# Altium PCB Board.PcbDoc
Units mm, origin at the board's own origin, x right, y up, seen from the top; angles counter-clockwise.
Board outline 73 x 86 mm, 4 copper layers (Top Layer, Gnd top, Gnd bot, Bottom Layer), stack 0.603 mm thick; 52 components, 35 nets, 180 pads, 66 vias.
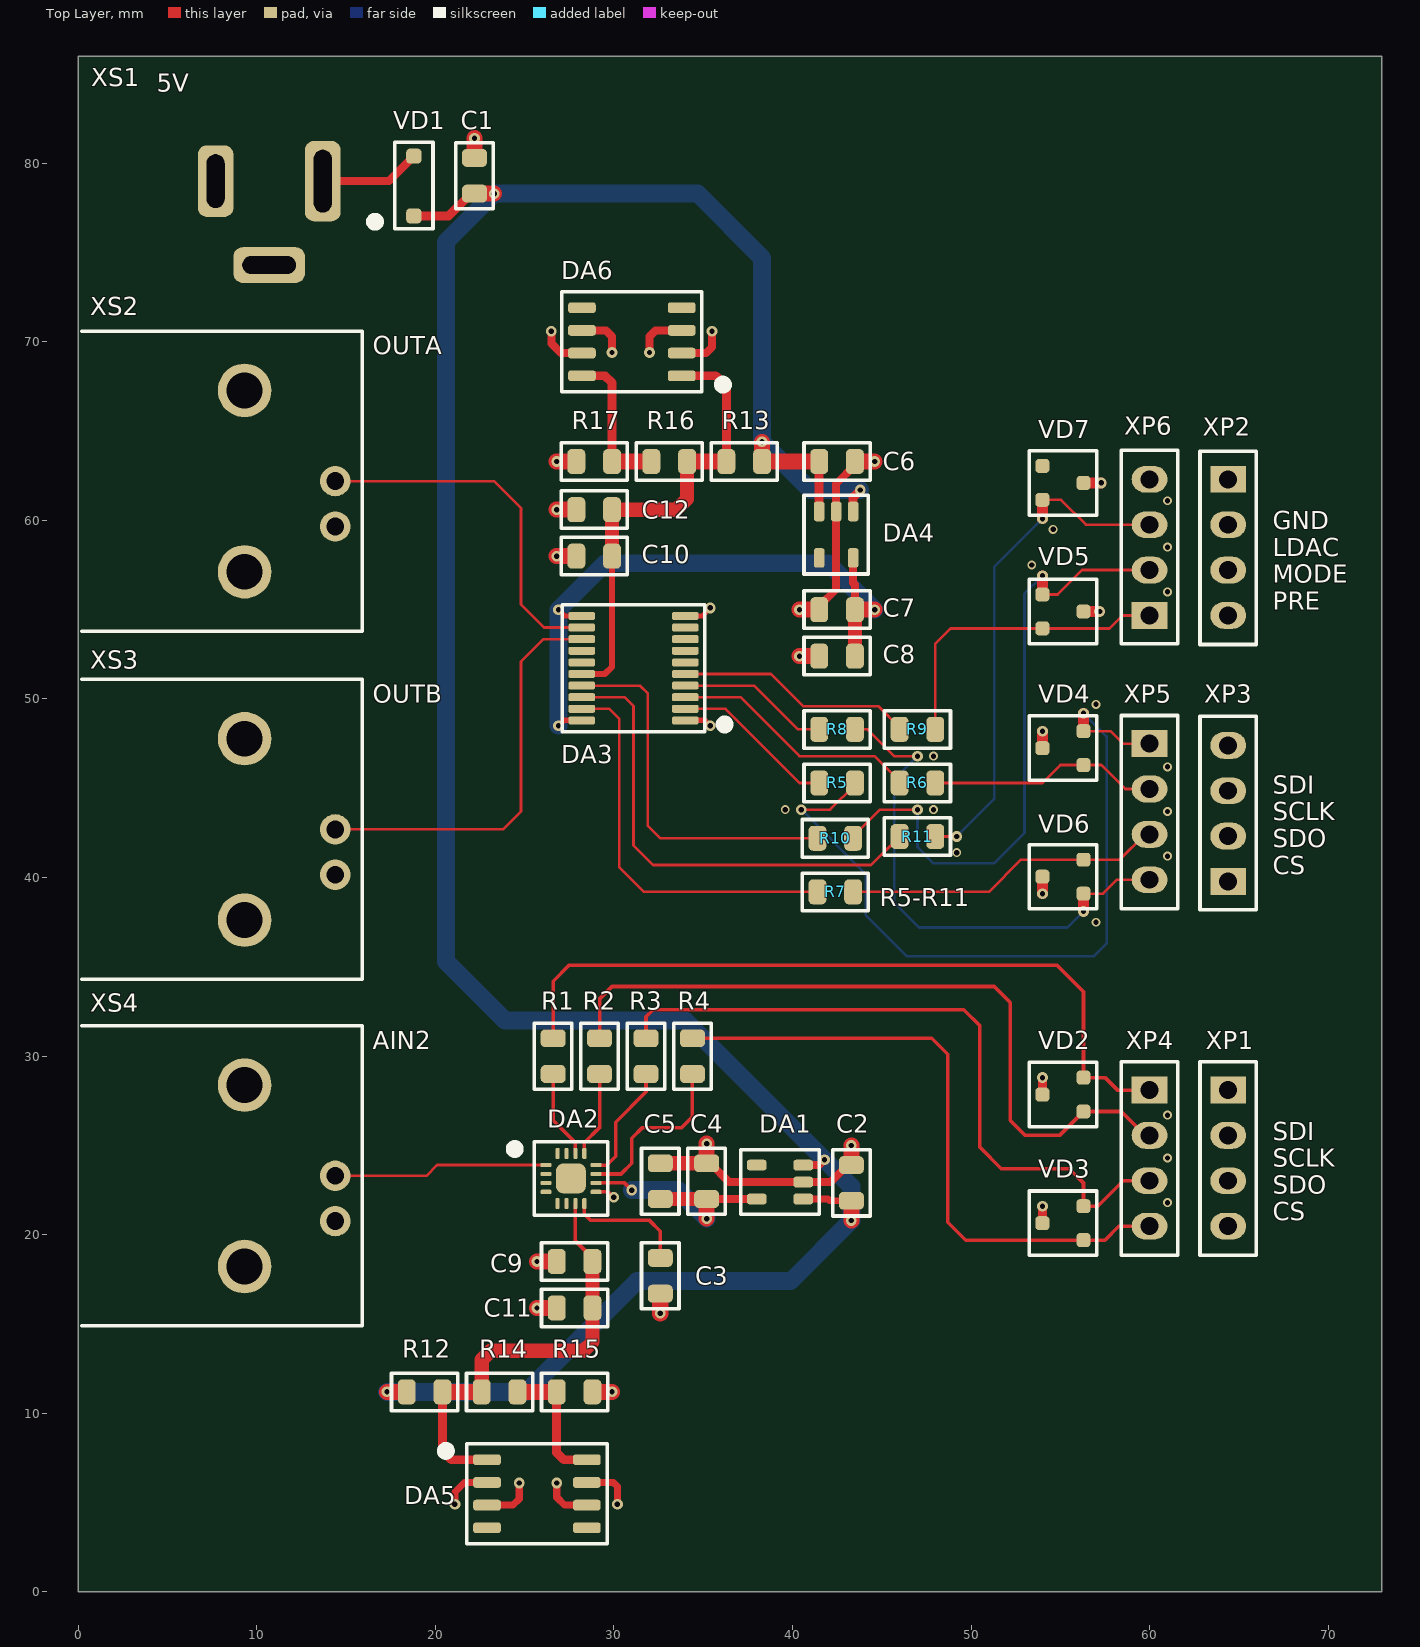
[diagram p0: Top Layer view]
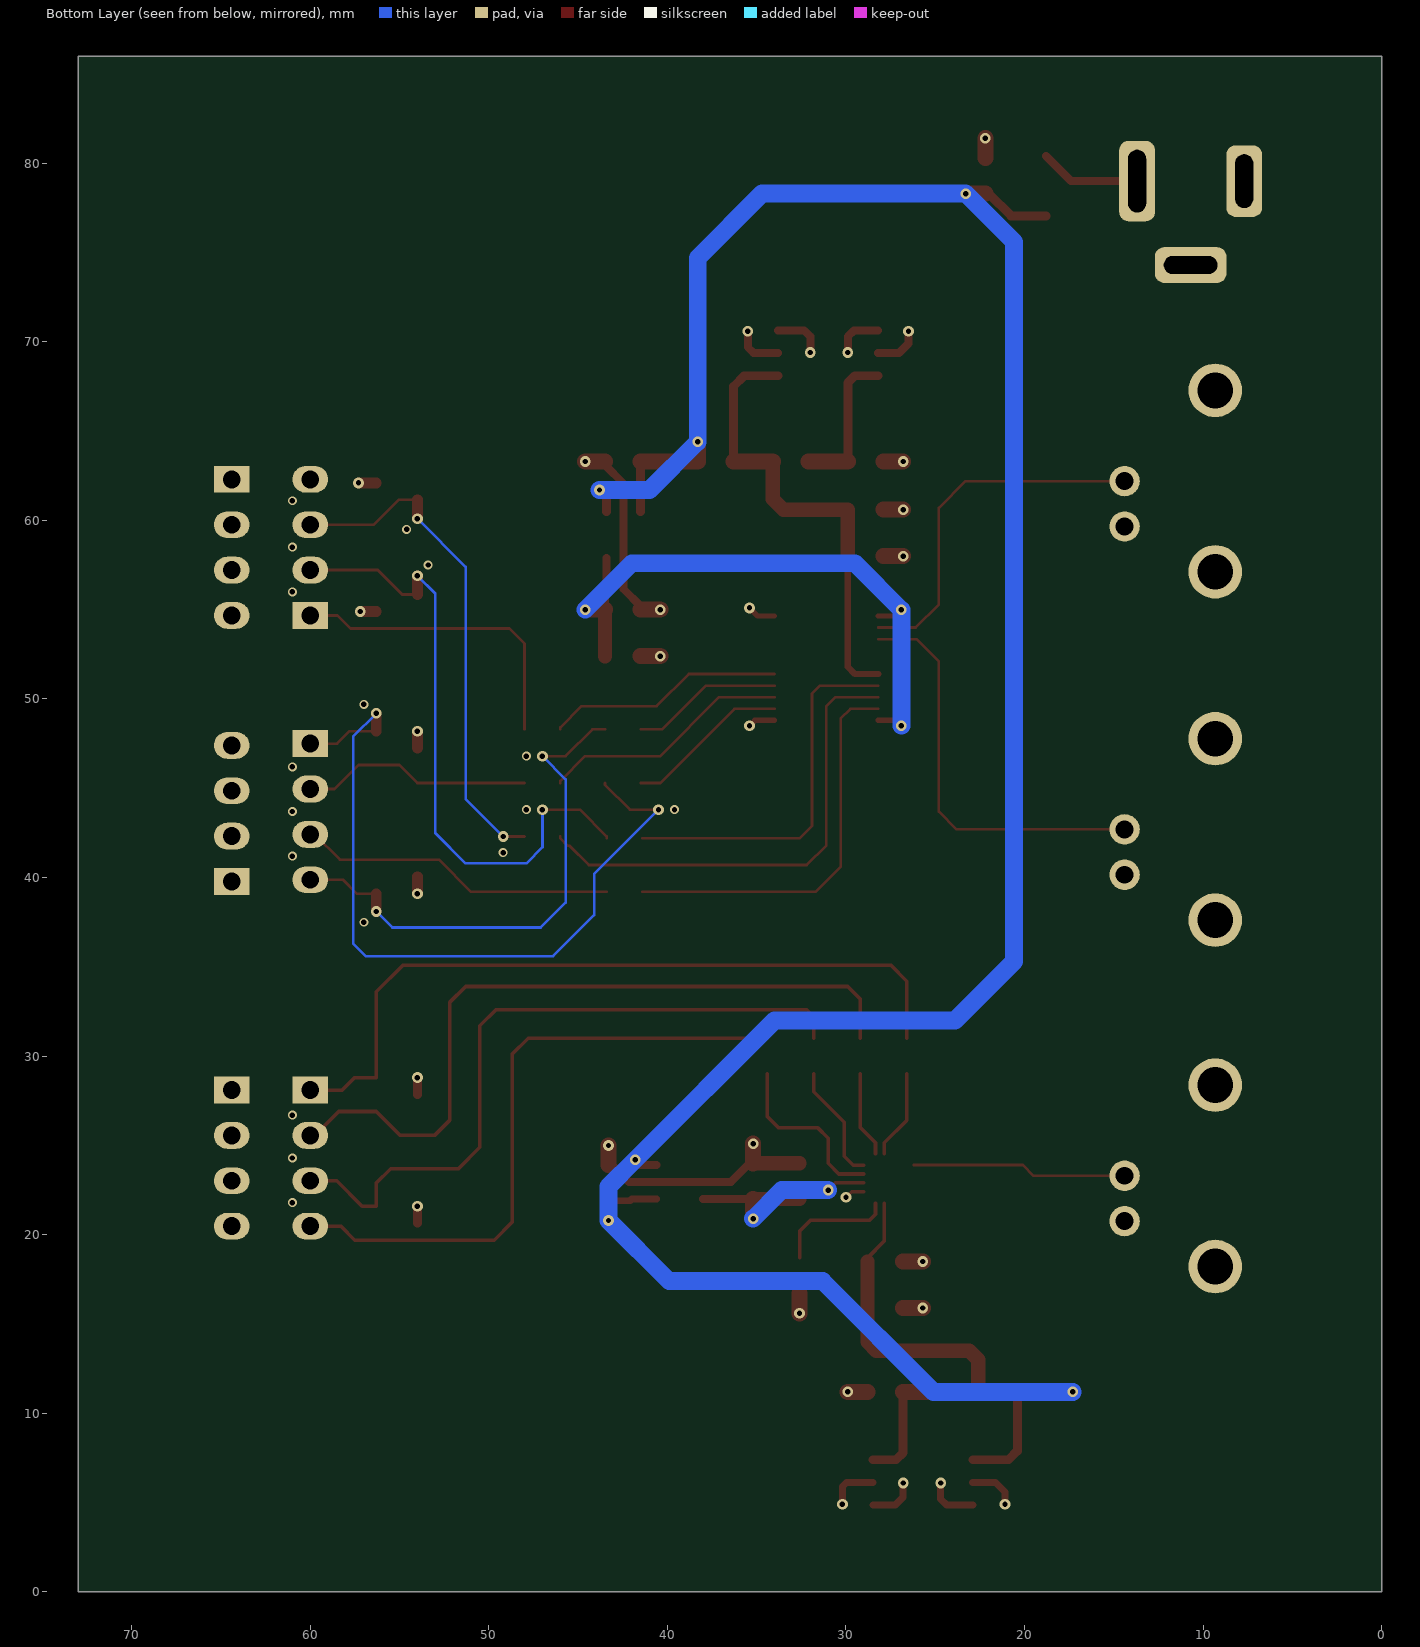
[diagram p1: Bottom Layer view, seen from below]
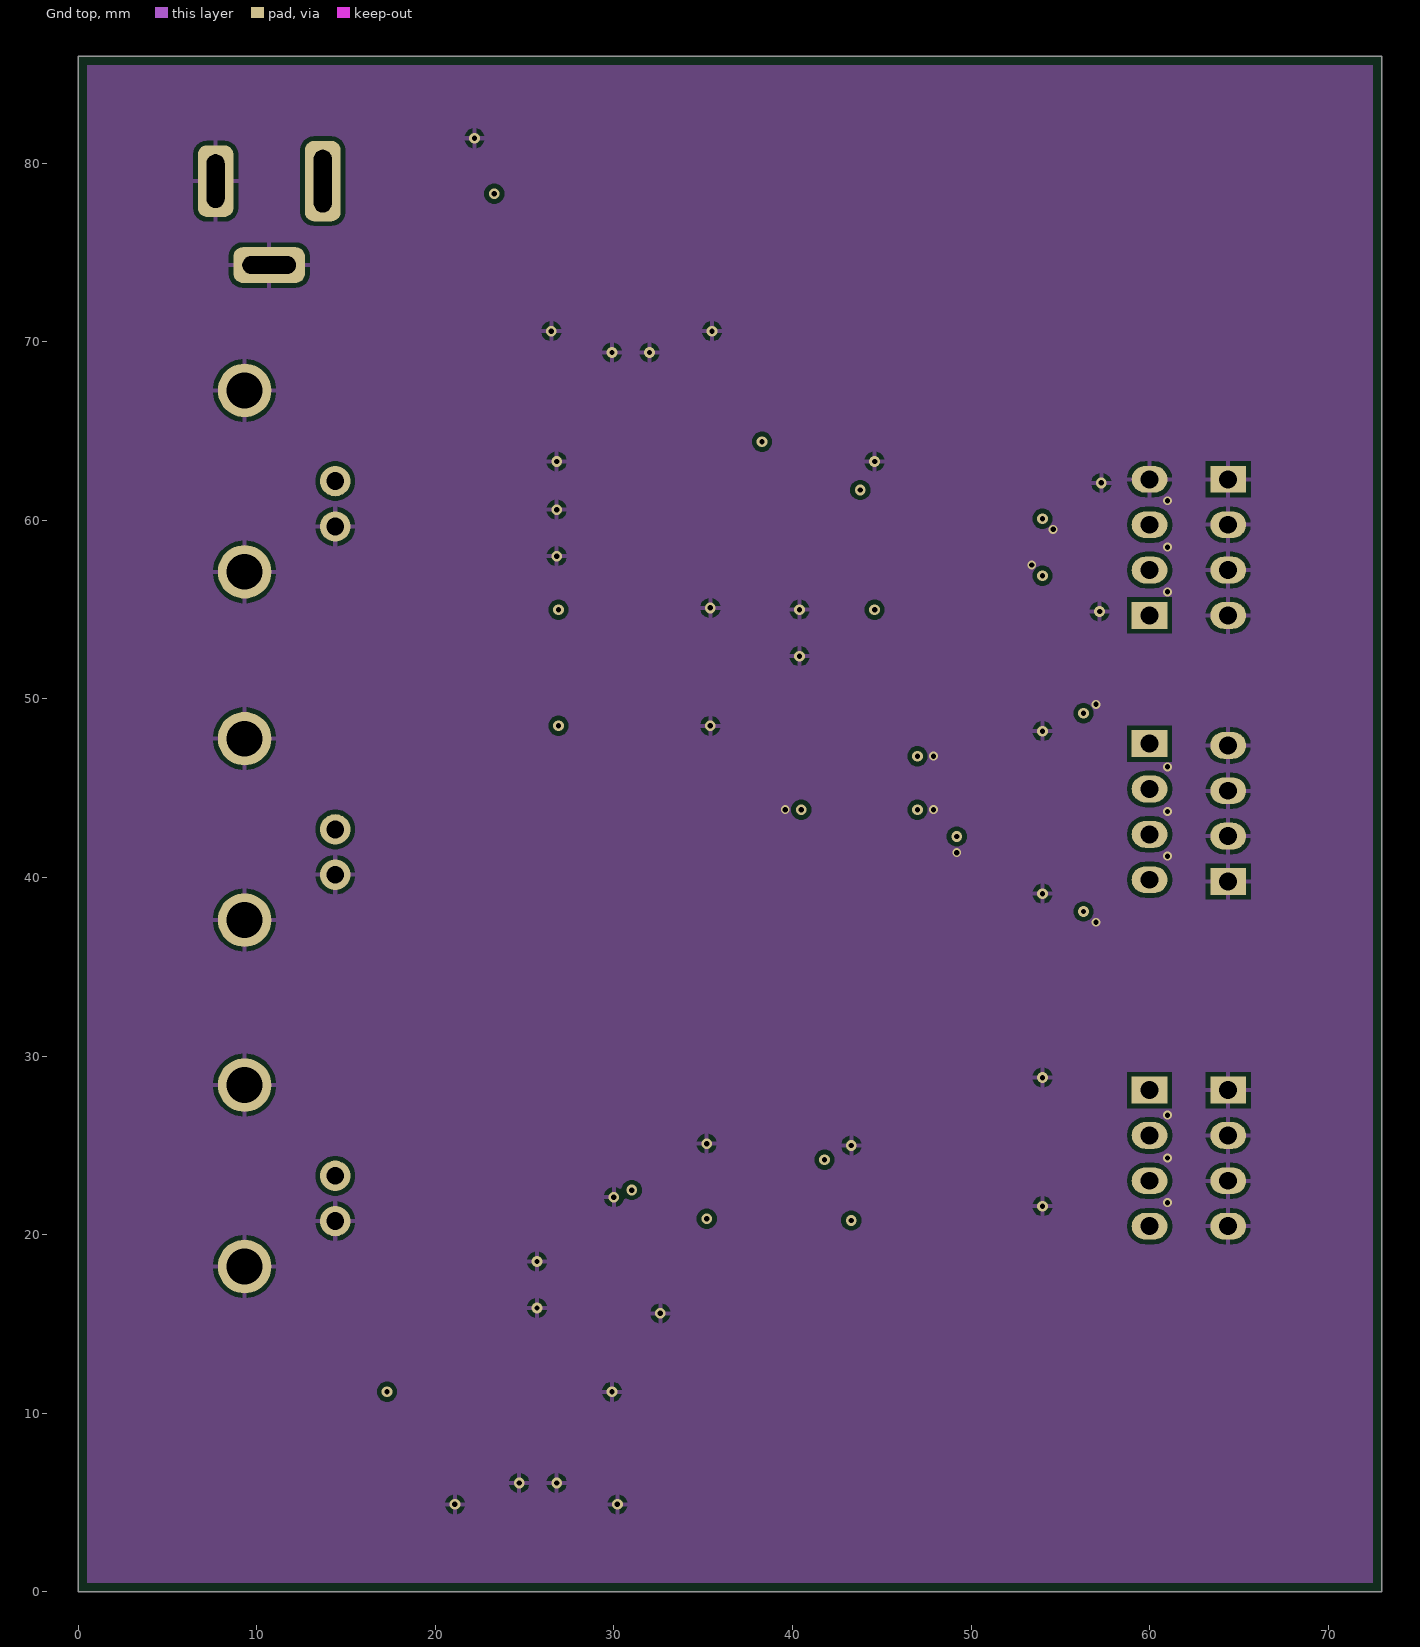
[diagram p2: Gnd top]
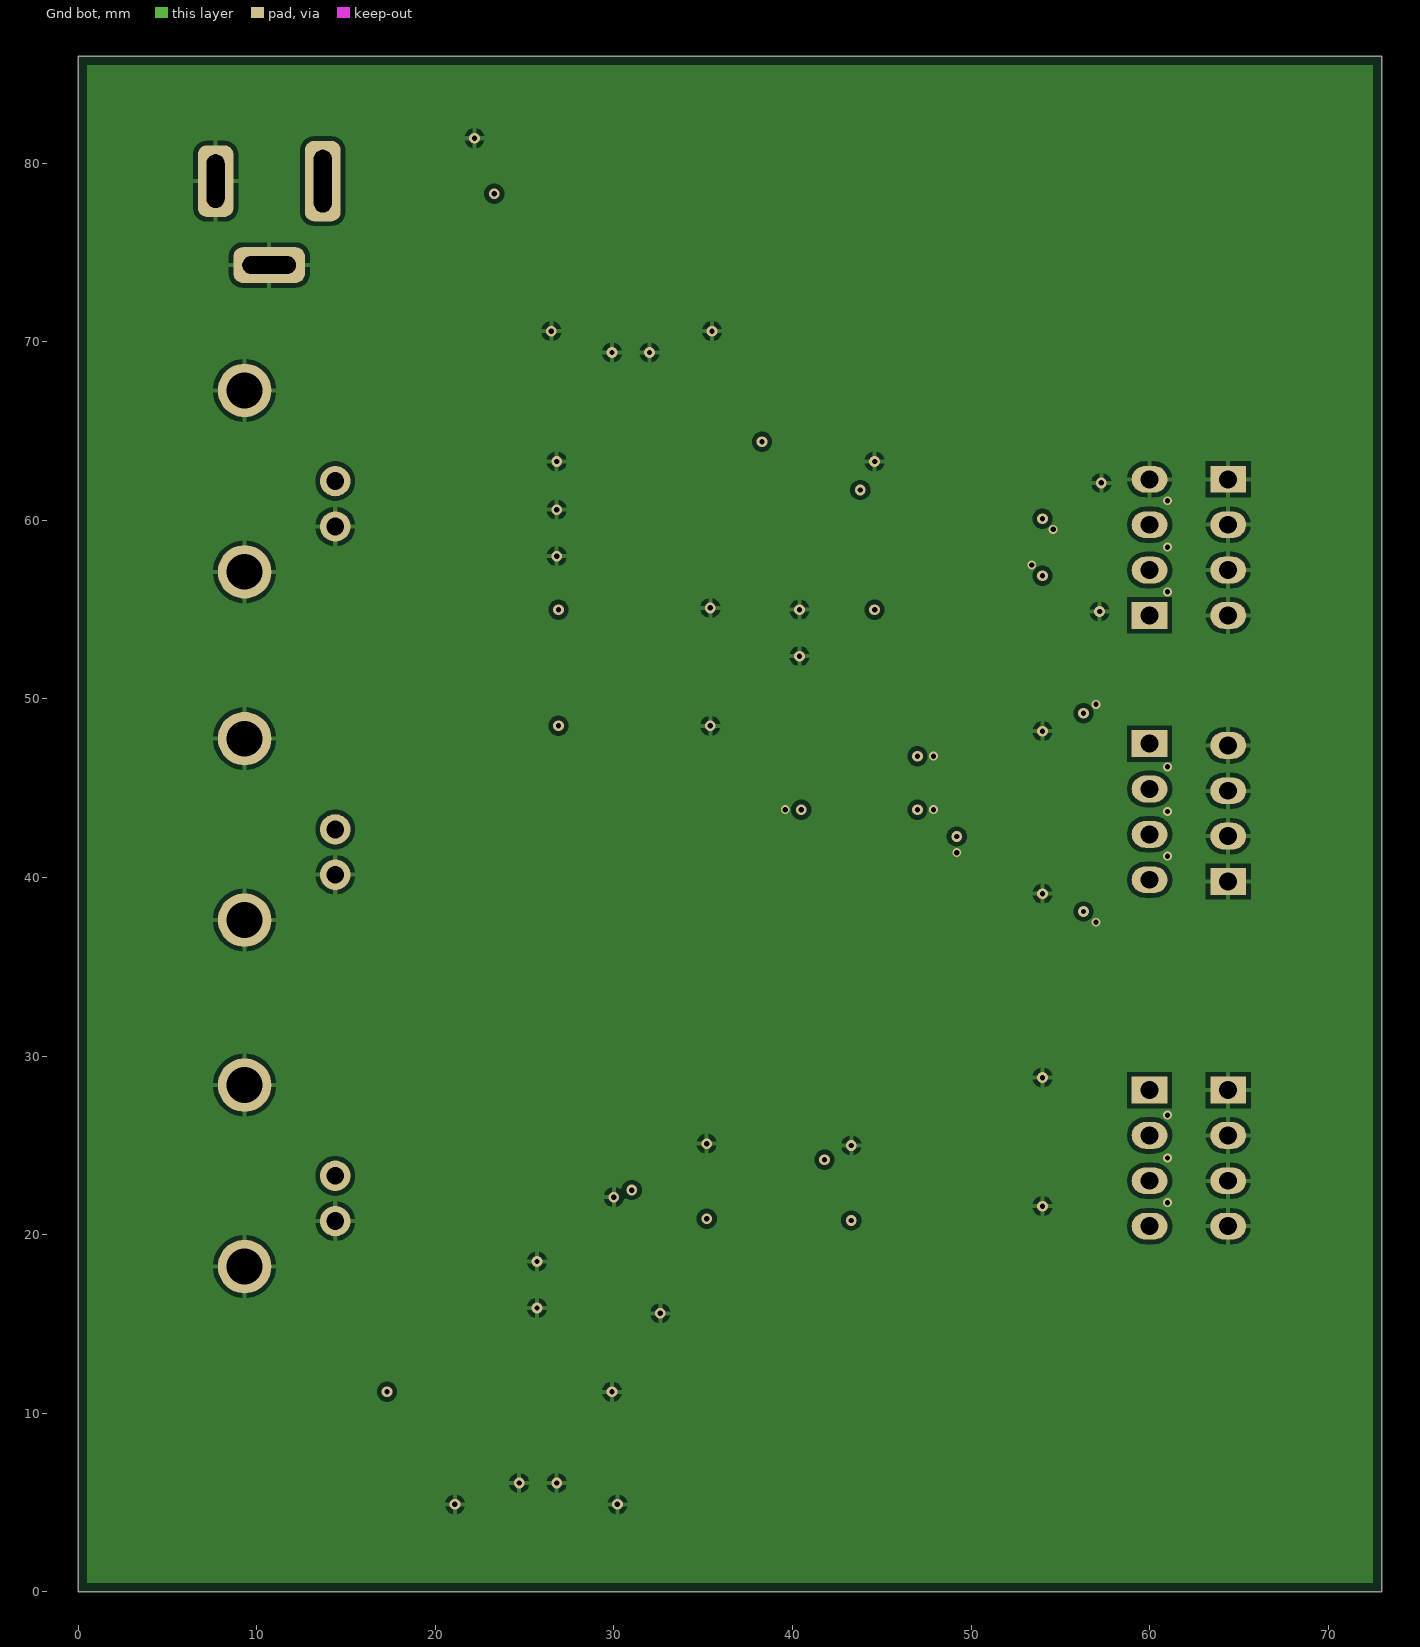
[diagram p3: Gnd bot]
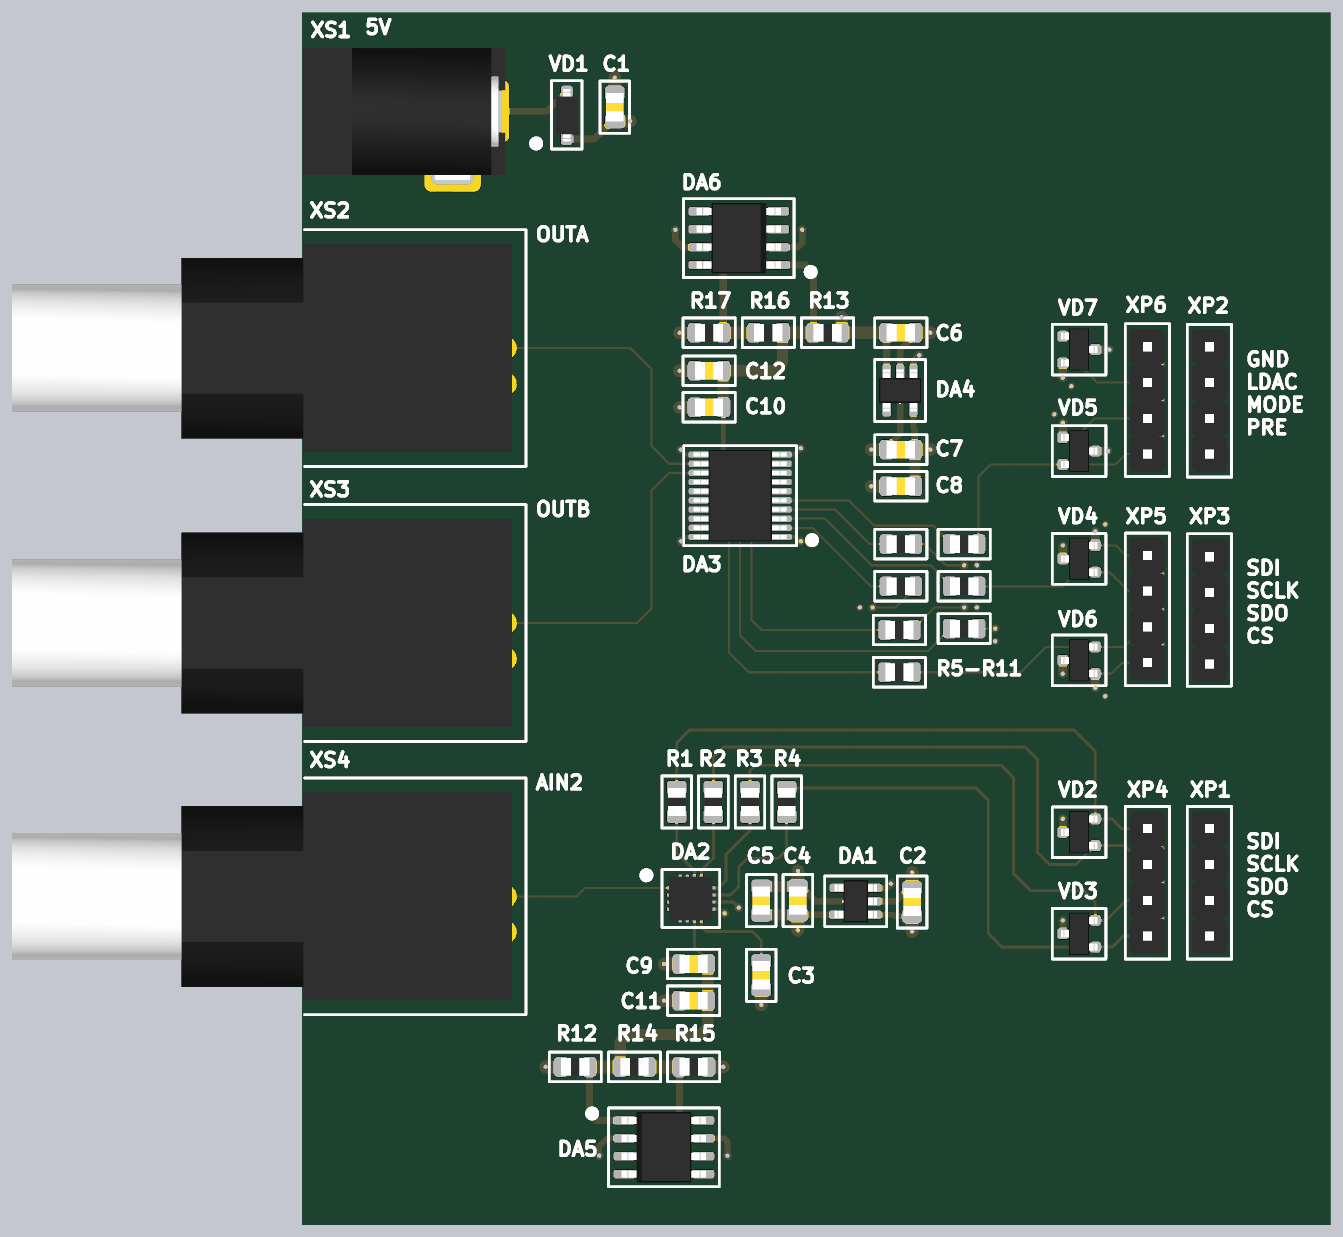
[diagram p4: 3D render of the assembled board from above, using the file's embedded part models]

## Layer stack, top to bottom
Top Solder: solder mask 0.0102, Solder Resist, Dk 3.5
Top Layer: signal copper 0.0356
Dielectric 2: prepreg 0.0711, PP-006, Dk 4.1
Gnd top: signal copper 0.035
Dielectric 1: dielectric 0.32, FR-4, Dk 4.8
Gnd bot: signal copper 0.035
Dielectric 3: prepreg 0.0711, PP-006, Dk 4.1
Bottom Layer: signal copper 0.0356
Bottom Solder: solder mask 0.0102, Solder Resist, Dk 3.5

## Board outline
0,0 0,86 73,86 73,0

## Design rules (kind name [scope] priority, off if disabled: settings)
Clearance [All] p1: gap=0.254 ignorepadtopadclearanceinfootprint=FALSE except(0: Arc-Hole Track-Hole SMDPad-Hole THPad-Hole Via-Hole Fill-Hole Poly-Hole Region-Hole Text-Hole; 0.1: Arc-Arc Arc-Track Arc-THPad Track-Track Track-THPad SMDPad-THPad; 0.15: Arc-SMDPad Track-SMDPad SMDPad-SMDPad; 0.2: Arc-Via Track-Via SMDPad-Via THPad-Via Via-Via; 0.6: THPad-THPad)
HoleToHoleClearance [All] p1: gap=0.45 allowstackedmicrovias=TRUE
MinimumSolderMaskSliver [All] p1: minsoldermaskwidth=0.1
PolygonConnect [All] p1: connectstyle=Relief reliefconductorwidth=0.254 reliefentries=4 polygonreliefangle="90 Angle" airgapwidth=0.254
RoutingVias [All] p1: holewidth=0.3 width=0.6 viastyle="Through Hole" minholewidth=0.15 minwidth=0.3 maxholewidth=0.3 maxwidth=0.6
SilkToSilkClearance [All] p1: silktosilkclearance=0.15
SilkToSolderMaskClearance [IsPad] p1: minsilkscreentomaskgap=0.15 clearancetoexposedcopper=TRUE
SolderMaskExpansion [All] p1: expansion=0.03 istentingtop=FALSE
Width [All] p1: maxlimit=2 minlimit=0.1 preferedwidth=0.15
26 further rules are at their usual default settings.

## Components (designator, comment, footprint, x,y, rotation, side; value= is the part's Value field where it differs from the comment)
C1 "10 uF x 10 V" CAPC2012X06N 22.2,78.3 r90 top
C2 "10 uF x 10 V" CAPC2012X06N 43.3,21.9 r90 top
C3 "1 uF x 50 V" CAPC2012X06N 32.6,18.7 r270 top
C4 "10 uF x 10 V" CAPC2012X06N 35.2,22 r90 top
C5 "1 uF x 50 V" CAPC2012X06N 32.6,22 r90 top
C6 "10 uF x 10 V" CAPC2012X06N 41.5,63.3 r0 top
C7 "10 uF x 10 V" CAPC2012X06N 43.5,55 r180 top
C8 "1 uF x 50 V" CAPC2012X06N 43.5,52.4 r180 top
C9 "1 uF x 50 V" CAPC2012X06N 28.8,18.5 r180 top
C10 "1 uF x 50 V" CAPC2012X06N 29.9,58 r180 top
C11 "10 uF x 10 V" CAPC2012X06N 28.8,15.9 r180 top
C12 "10 uF x 10 V" CAPC2012X06N 29.9,60.6 r180 top
DA1 "TPS76333DBVT" DBV0005A 39.3,22.95 r180 top
DA2 "ADS7038IRTET" RTE0016C 27.6,23.15 r0 top
DA3 "TLV5631IPW" PW0020A 34,48.8 r180 top
DA4 "TPS76333DBVT" DBV0005A 42.45,59.2 r270 top
DA5 "TL431AID" D0008A 22.9,7.4 r0 top
DA6 "TL431AID" D0008A 33.8,68.1 r180 top
R1 "22 Ohms" RESC2012X06N 26.6,29 r90 top
R2 "22 Ohms" RESC2012X06N 29.2,29 r90 top
R3 "22 Ohms" RESC2012X06N 31.8,29 r90 top
R4 "22 Ohms" RESC2012X06N 34.4,29 r90 top
R5 "22 Ohms" RESC2012X06N 41.5,45.3 r0 top
R6 "22 Ohms" RESC2012X06N 46,45.3 r0 top
R7 "22 Ohms" RESC2012X06N 41.4,39.2 r0 top
R8 "22 Ohms" RESC2012X06N 41.5,48.3 r0 top
R9 "22 Ohms" RESC2012X06N 46,48.3 r0 top
R10 "22 Ohms" RESC2012X06N 41.4,42.2 r0 top
R11 "22 Ohms" RESC2012X06N 46,42.3 r0 top
R12 "182 Ohms" RESC2012X06N 18.4,11.2 r0 top
R13 "182 Ohms" RESC2012X06N 38.3,63.3 r180 top
R14 "3.3 kOhms" RESC2012X06N 24.6,11.2 r180 top
R15 "10 kOhms" RESC2012X06N 28.8,11.2 r180 top
R16 "3.3 kOhms" RESC2012X06N 32.1,63.3 r0 top
R17 "10 kOhms" RESC2012X06N 27.9,63.3 r0 top
VD1 "BAT54W-HG3-18" SOD-123 18.8,77.05 r90 top
VD2 "SP0502BAHT" SOT23 55.15,27.85 r90 top
VD3 "SP0502BAHT" SOT23 55.15,20.65 r90 top
VD4 "SP0502BAHT" SOT23 55.15,47.25 r90 top
VD5 "SP0502BAHT" SOT23 55.15,54.9 r270 top
VD6 "SP0502BAHT" SOT23 55.15,40.05 r90 top
VD7 "SP0502BAHT" SOT23 55.15,62.1 r270 top
XP1 "M20-9770346-4" HDRV4W64P254_1X4_1016X254X834P 64.4,28.1 r270 top
XP2 "M20-9770346-4" HDRV4W64P254_1X4_1016X254X834P 64.4,62.3 r270 top
XP3 "M20-9770346-4" HDRV4W64P254_1X4_1016X254X834P 64.4,39.78 r90 top
XP4 "M20-9770346-4" HDRV4W64P254_1X4_1016X254X834P 60,28.1 r270 top
XP5 "M20-9770346-4" HDRV4W64P254_1X4_1016X254X834P 60,47.5 r270 top
XP6 "M20-9770346-4" HDRV4W64P254_1X4_1016X254X834P 60,54.68 r90 top
XS1 "PJ-002AH" "PJ-002AH (Same Sky)" 13.7,79 r0 top
XS2 "0731385003" "0731385003 (Molex)" 14.4,62.2 r0 top
XS3 "0731385003" "0731385003 (Molex)" 14.4,42.7 r0 top
XS4 "0731385003" "0731385003 (Molex)" 14.4,23.3 r0 top

## Footprints (in the part's own frame and the unit in brackets; to place one, negate y for a bottom-side part, rotate by r counter-clockwise, add the part's x,y. Pads: shape width x height; smd on the part's side, far side on the other; paste and mask are expansions set on the pad)
"0731385003 (Molex)" [mm] "BNC Connector Jack, 4-Leads, Body 35.45x14.75 mm"
  round 1.7 hole 1: 1(0,0) 2(0,-2.54)
  round 3 hole 2: 3(-5.08,5.08) 4(-5.08,-5.08)
  silkscreen extent -14.2,-8.4 1.5,8.4, body extent -34.95,-7.37 0.5,7.37, height 15.88
CAPC2012X06N [mm] "Chip Capacitor, 2-Leads, Body 2.00x1.25mm, IPC Medium Density"
  rrect50% 1x1.4 smd mask+0.05: 1(0,0) 2(2,0)
  silkscreen extent -0.85,-1.05 2.85,1.05, body extent 0,-0.63 2,0.63, height 1.25
D0008A [mm] "SOIC, 8-Leads, Body 5.00x3.90 mm, IPC Medium Density"
  rrect50% 1.55x0.6 smd mask+0.05: 1(0,0) 2(0,-1.27) 3(0,-2.54) 4(0,-3.81) 5(5.588,-3.81) 6(5.588,-2.54) 7(5.588,-1.27) 8(5.588,0)
  silkscreen extent -2.56,-4.7 6.72,0.89, body extent -0.21,-4.41 5.79,0.6, height 1.75
DBV0005A [mm] "SOT-23, 5-Leads, Body 3.00x1.75 mm, IPC Medium Density"
  rrect50% 1.1x0.6 smd mask+0.05: 1(-1.3,0.95) 2(-1.3,0) 3(-1.3,-0.95) 4(1.3,-0.95) 5(1.3,0.95)
  silkscreen extent -2.2,-1.8 2.2,1.8, body extent -1.5,-1.5 1.5,1.5, height 1.45
HDRV4W64P254_1X4_1016X254X834P [mm] "Connector, 4-Leads, Body 10.16x2.54mm, IPC Medium Density"
  rect 1.5x2 hole 1: 1(0,0)
  oval 1.5x2 hole 1: 2(2.54,0) 3(5.08,0) 4(7.62,0)
  silkscreen extent -1.58,-1.58 9.25,1.58, body extent -1.27,-1.27 8.89,1.27, height 8.34
"PJ-002AH (Same Sky)" [mm] "Connector, 3-Leads, Body 14.40x9.00 mm"
  rrect50% 2x4.5 hole 1 slot 3.5 at 90 deg mask+0.05: 1(0,0)
  rrect50% 2x4 hole 1 slot 3 at 90 deg mask+0.05: 2(-6,0)
  rrect50% 4x2 hole 1 slot 3 at 0 deg mask+0.05: 3(-3,-4.7)
  body extent -13.65,-4.9 0.75,4.5, height 11
PW0020A [mm] "TSSOP, 20-Leads, Body 6.50x4.50 mm, IPC Medium Density"
  rrect50% 1.5x0.45 smd mask+0.03: 1(0,0) 2(0,-0.65) 3(0,-1.3) 4(0,-1.95) 5(0,-2.6) 6(0,-3.25) 7(0,-3.9) 8(0,-4.55) 9(0,-5.2) 10(0,-5.85) 11(5.8,-5.85) 12(5.8,-5.2) 13(5.8,-4.55) 14(5.8,-3.9) 15(5.8,-3.25) 16(5.8,-2.6) 17(5.8,-1.95) 18(5.8,-1.3) 19(5.8,-0.65) 20(5.8,0)
  silkscreen extent -2.45,-6.48 6.9,0.63, body extent -0.4,-6.18 6.2,0.33, height 1.2
RESC2012X06N [mm] "Chip Resistor, 2-Leads, Body 2.00x1.25mm, IPC Medium Density"
  rrect50% 1x1.4 smd mask+0.05: 1(0,0) 2(2,0)
  silkscreen extent -0.85,-1.05 2.85,1.05, body extent 0,-0.63 2,0.63, height 1.25
RTE0016C [mm] "WQFN, 17-Leads, Body 3.10x3.10 mm, IPC Medium Density"
  rrect50% 0.6x0.24 smd mask+0.05: 1(-1.4,0.75) 2(-1.4,0.25) 3(-1.4,-0.25) 4(-1.4,-0.75) 9(1.4,-0.75) 10(1.4,-0.25) 11(1.4,0.25) 12(1.4,0.75)
  rrect50% 0.24x0.6 smd mask+0.05: 5(-0.75,-1.4) 6(-0.25,-1.4) 7(0.25,-1.4) 8(0.75,-1.4) 13(0.75,1.4) 14(0.25,1.4) 15(-0.25,1.4) 16(-0.75,1.4)
  rrect50% 1.68x1.68 smd mask+0.05: 17(0,0)
  silkscreen extent -3.4,-2.05 2.05,2.05, body extent -1.55,-1.55 1.55,1.55, height 0.8
SOD-123 [mm] "Chip Diode, 2-Leads, Body 2.70x1.55mm, IPC Medium Density"
  rrect50% 0.85x0.85 smd mask+0.05: 1(0,0) 2(3.35,0)
  silkscreen extent -0.72,-1.07 4.13,2.42, body extent -0.17,-0.77 3.52,0.77, height 1.17
SOT23 [mm] "SOT, 3-Leads, Body 3.00x1.40 mm, IPC Medium Density"
  rrect50% 0.78x0.78 smd mask+0.045: 1(-0.95,-1.15) 2(0.95,-1.15) 3(0,1.15)
  silkscreen extent -1.8,-1.9 1.8,1.9, body extent -1.5,-1.3 1.5,1.3, height 1.1

## Part data
C1 C2 C4 C6 C7 C11 C12: library part KGM21AR71A106KU, "MLCC - Multilayer Ceramic Capacitors", Capacitance="10 uF", Package=0805, Tolerance=10%, Voltage Rating="10 V"
C3 C5 C8 C9 C10: library part KGF21KR71H105KU, "MLCC - Multilayer Ceramic Capacitors", Capacitance="1 uF", Package=0805, Tolerance=10%, Voltage Rating="50 V"
DA1 DA4: "150mA, 10V, Low-Dropout Voltage Regulator"
DA2: "Small, 8-Channel, 12-Bit ADC With SPI Interface, GPIOs, and CRC"
DA3: "8-CHANNEL, 12-/10-/8-BIT, 2.7-V TO 5.5-V LOW POWER DIGITAL-TO-ANALOG CONVERTERS WITH POWER DOWNANDINTERNAL REFERENCE"
R1 R2 R3 R4 R5 R6 R7 R8 R9 R10 R11: library part RCA080522R0FKEA, "Thick Film Chip Resistors", Package=0805, Tolerance=1%, Resistance="22 Ohms"
R12 R13: library part CR0805-FX-1820ELF, "Thick Film Chip Resistors", Package=0805, Tolerance=1%, Resistance="182 Ohms"
R14 R16: library part CR0805-FX-3301ELF, "Thick Film Chip Resistors", Package=0805, Tolerance=1%, Resistance="3.3 kOhms"
R15 R17: library part ERJ-6ENF1002V, "Thick Film Chip Resistors", Package=0805, Tolerance=1%, Resistance="10 kOhms"
VD1: "Schottky Diodes & Rectifiers 30V Schottky DIODE"
VD2 VD3 VD4 VD5 VD6 VD7: "TVS Diode Array"
XP1 XP2 XP3 XP4 XP5 XP6: "Header 2.54mm"
XS1: "DC POWER JACK"
XS2 XS3 XS4: "BNC Connector Jack"

## Via types
v1: diameter 0.6, hole 0.3, Top Layer to Bottom Layer, tented both sides, 49 vias
v2: diameter 0.5, hole 0.3, Top Layer to Bottom Layer, tented both sides, 17 vias

## Nets (pads, with @x,y where several pads share a name; then routed paths per layer and width w, separated by ;. In a path a pad name is that pad's centre, name@x,y a point inside that pad or via, vN(x,y) a via of type N, cw(c..) or ccw(c..) an arc to the next point about the centre after c; other vN are vias at no path point)
+5V: C1.1 C2.1 C6.1 DA1.1 DA1.3 DA4.1 DA4.3 R12.1 R13.1 VD1.1 | length 157.1
  Top Layer w0.381: DA1.1 42,22 42.1,21.9 C2.1
  Top Layer w0.45: DA1.3 41.5,23.9 v1(41.8,24.2)
  Top Layer w0.5: VD1.1 20.75,77.05 22,78.3 C1.1 ; DA4.3 C6.1 ; DA4.1 43.4,61.3 v1(43.8,61.7)
  Top Layer w0.9: v1(17.3,11.2) R12.1 ; C1.1 v1(23.3,78.3) ; v1(38.3,64.4) R13.1 C6.1 ; v1(43.3,20.8) C2.1
  Bottom Layer w1: v1(17.3,11.2) 25.1,11.2 31.3,17.4 39.9,17.4 v1(43.3,20.8) 43.3,22.7 v1(41.8,24.2) 34,32 23.9,32 20.6,35.3 20.6,75.6 v1(23.3,78.3) 34.7,78.3 38.3,74.7 v1(38.3,64.4) 41,61.7 v1(43.8,61.7)
ADC_AVDD: C9.1 C11.1 DA2.7 DA5.1 R12.2 R14.2 | length 24.8
  Top Layer w0.2: DA2.7 27.85,19.65 28.8,18.7 C9.1
  Top Layer w0.5: R12.2 20.4,7.9 20.9,7.4 DA5.1
  Top Layer w0.8: R14.2 22.6,13 23.1,13.5 28.3,13.5 28.8,14 C9.1
  Top Layer w0.9: R12.2 R14.2
ADC_DVDD: C4.1 C5.1 DA1.5 DA2.10 | length 13.5
  Top Layer w0.2: DA2.10 30.6,22.9 v1(31,22.5)
  Top Layer w0.45: C4.1 DA1.5
  Top Layer w0.8: C5.1 C4.1
  Top Layer w0.9: v1(35.2,20.9) C4.1
  Bottom Layer w1: v1(31,22.5) 33.6,22.5 v1(35.2,20.9)
DAC_REF: C10.1 C12.1 DA3.16 DA6.1 R13.2 R16.2 | length 26.4
  Top Layer w0.35: DA3.16 29.5,51.4 29.9,51.8 C10.1
  Top Layer w0.5: DA6.1 35.7,68.1 36.3,67.5 R13.2
  Top Layer w0.8: C10.1 C12.1 33.5,60.6 34.1,61.2 R16.2
  Top Layer w0.9: R16.2 R13.2
DAC_VDD: C7.1 C8.1 DA3.11 DA3.20 DA4.5 | length 35.9
  Top Layer w0.3: v1(26.9,48.5) 27.2,48.8 DA3.20 ; v1(26.9,55) 27.25,54.65 DA3.11
  Top Layer w0.45: DA4.5 43.4,56.5 43.5,56.4 C7.1
  Top Layer w0.8: C8.1 C7.1
  Top Layer w0.9: C7.1 v1(44.6,55)
  Bottom Layer w1: v1(26.9,48.5) v1(26.9,55) 29.5,57.6 42,57.6 v1(44.6,55)
GND: C1.2 C2.2 C3.2 C4.2 C5.2 C6.2 C7.2 C8.2 C9.2 C10.2 C11.2 C12.2 DA1.2 DA2.9 DA3.1 DA3.10 DA4.2 DA5.2 DA5.3 DA5.6 DA5.7 DA6.2 DA6.3 DA6.6 DA6.7 R15.1 R17.1 VD2.3 VD3.3 VD4.3 VD5.3 VD6.3 VD7.3 XP1.1 XP1.2 XP1.3 XP1.4 XP2.1 XP2.2 XP2.3 XP2.4 XP3.1 XP3.2 XP3.3 XP3.4 XP6.4 XS1.2 XS1.3 XS2.2 XS2.3 XS2.4 XS3.2 XS3.3 XS3.4 XS4.2 XS4.3 XS4.4 | length 66.9
  Top Layer w0.2: DA2.9 29.683,22.4 29.983,22.1 v1(30,22.1)
  Top Layer w0.3: DA3.1 35.1,48.8 v1(35.4,48.5) ; DA3.10 34.95,54.65 v1(35.4,55.1)
  Top Layer w0.381: C4.2 C4.2@35.4,24
  Top Layer w0.4: v1(21.1,4.9) 21.1,5.6 21.63,6.13 DA5.2 ; DA5.3 24.36,4.86 24.7,5.2 v1(24.7,6.1) ; v1(26.8,6.1) 26.8,5.3 27.24,4.86 DA5.6 ; DA5.7 29.966,6.13 30.2,5.896 v1(30.2,4.9)
  Top Layer w0.45: v1(26.5,70.6) 26.5,69.9 27.03,69.37 DA6.7 ; DA6.6 29.56,70.64 29.9,70.3 v1(29.9,69.4) ; v1(32,69.4) 32,70.3 32.34,70.64 DA6.3 ; DA6.2 35.17,69.37 35.5,69.7 v1(35.5,70.6) ; C4.2@35.4,24 36.45,22.95 DA1.2 42.15,22.95 43.1,23.9 C2.2 ; C7.2 41.5,55.2 42.45,56.15 DA4.2 42.45,62.05 43.5,63.1 C6.2
  Top Layer w0.5: VD3.3 v1(54,21.6) ; VD2.3 v1(54,28.8)
  Top Layer w0.6: v1(54,39.1) VD6.3 ; VD4.3 v1(54,48.2) ; VD5.3 v1(57.2,54.9) ; VD7.3 v1(57.3,62.1)
  Top Layer w0.8: C5.2 C4.2
  Top Layer w0.9: C1.2 v1(22.2,81.4) ; v1(25.7,15.9) C11.2 ; v1(25.7,18.5) C9.2 ; v1(26.8,58) C10.2 ; v1(26.8,60.6) C12.2 ; v1(26.8,63.3) R17.1 ; R15.1 v1(29.9,11.2) ; v1(32.6,15.6) C3.2 ; C4.2 v1(35.2,25.1) ; v1(40.4,52.4) C8.2 ; v1(40.4,55) C7.2 ; C2.2 v1(43.3,25) ; C6.2 v1(44.6,63.3)
  other v2: 61,21.8 61,24.3 61,26.7 57,37.5 61,41.2 49.2,41.4 61,43.7 39.6,43.8 47.9,43.8 61,46.2 47.9,46.8 57,49.7 61,56 53.4,57.5 61,58.5 54.6,59.5 61,61.1
NetC3_1: C3.1 DA2.8 | length 6.7
  Top Layer w0.2: DA2.8 28.35,21.15 28.7,20.8 32,20.8 32.6,20.2 C3.1
NetDA2_1: DA2.1 XS4.1 | length 12
  Top Layer w0.15: XS4.1 19.5,23.3 20.1,23.9 DA2.1
NetDA2_11: DA2.11 R4.1 | length 9.9
  Top Layer w0.2: DA2.11 30.4,23.4 31,24 31,25.4 31.6,26 33.8,26 34.4,26.6 R4.1
NetDA2_12: DA2.12 R3.1 | length 6.6
  Top Layer w0.2: DA2.12 29.6,23.9 30.1,24.4 30.1,26.3 31.8,28 R3.1
NetDA2_13: DA2.13 R2.1 | length 4.8
  Top Layer w0.2: DA2.13 28.35,25.15 29.2,26 R2.1
NetDA2_14: DA2.14 R1.1 | length 5
  Top Layer w0.2: R1.1 26.6,26.4 27.85,25.15 DA2.14
NetDA3_2: DA3.2 R5.1 | length 9.2
  Top Layer w0.15: DA3.2 36.25,49.45 40.4,45.3 R5.1
NetDA3_3: DA3.3 R6.1 | length 14
  Top Layer w0.15: DA3.3 37.1,50.1 40.4,46.8 44.605,46.8 46,45.405 R6.1
NetDA3_4: DA3.4 R8.1 | length 8.5
  Top Layer w0.15: DA3.4 37.85,50.75 40.3,48.3 R8.1
NetDA3_5: DA3.5 R9.1 | length 13.3
  Top Layer w0.15: DA3.5 38.8,51.4 40.6,49.6 44.805,49.6 46,48.405 R9.1
NetDA3_12: DA3.12 XS2.1 | length 20.4
  Top Layer w0.15: XS2.1 23.3,62.2 24.8,60.7 24.8,55.3 26.1,54 DA3.12
NetDA3_13: DA3.13 XS3.1 | length 23.1
  Top Layer w0.15: XS3.1 23.8,42.7 24.8,43.7 24.8,52.1 26.05,53.35 DA3.13
NetDA3_17: DA3.17 R10.1 | length 21.1
  Top Layer w0.15: DA3.17 31.45,50.75 31.9,50.3 31.9,42.9 32.6,42.2 R10.1
NetDA3_18: DA3.18 R11.1 | length 27
  Top Layer w0.15: DA3.18 30.6,50.1 31.1,49.6 31.1,41.8 32.2,40.7 44.4,40.7 45.483,41.783 45.588,41.783 46,42.195 R11.1
NetDA3_19: DA3.19 R7.1 | length 22.3
  Top Layer w0.15: DA3.19 29.75,49.45 30.3,48.9 30.3,40.6 31.7,39.2 R7.1
NetDA5_8: DA5.8 R14.1 R15.2 | length 7.5
  Top Layer w0.5: R15.2 26.8,7.8 27.2,7.4 DA5.8
  Top Layer w0.9: R14.1 R15.2
NetDA6_8: DA6.8 R16.1 R17.2 | length 8.5
  Top Layer w0.5: DA6.8 29.5,68.1 29.9,67.7 R17.2
  Top Layer w0.9: R17.2 R16.1
NetR1_2: R1.2 VD2.2 XP4.1 | length 42.7
  Top Layer w0.2: R1.2 26.6,34.2 27.5,35.1 54.8,35.1 56.3,33.6 VD2.2 57.5,28.8 58.2,28.1 XP4.1
NetR2_2: R2.2 VD2.1 XP4.2 | length 41.7
  Top Layer w0.2: R2.2 29.2,33.2 29.9,33.9 51.3,33.9 52.2,33 52.2,26.4 53.04,25.56 54.96,25.56 VD2.1 58.41,26.9 59.75,25.56 XP4.2
NetR3_2: R3.2 VD3.2 XP4.3 | length 39.5
  Top Layer w0.2: R3.2 31.8,32.2 32.2,32.6 49.6,32.6 50.5,31.7 50.5,24.9 51.7,23.7 55.5,23.7 56.3,22.9 VD3.2 57.1,21.6 58.52,23.02 XP4.3
NetR4_2: R4.2 VD3.1 XP4.4 | length 36.1
  Top Layer w0.2: R4.2 47.8,31 48.7,30.1 48.7,20.7 49.7,19.7 VD3.1 57.5,19.7 58.28,20.48 XP4.4
NetR5_2: R5.2 VD4.2 XP5.1 | length 44.2
  Top Layer w0.15: v1(40.5,43.8) 42.105,43.8 43.5,45.195 R5.2 ; VD4.2 57.8,48.2 58.5,47.5 XP5.1
  Top Layer w0.6: VD4.2 v1(56.3,49.2)
  Bottom Layer w0.15: v1(40.5,43.8) 44.1,40.2 44.1,37.9 46.4,35.6 56.9,35.6 57.6,36.3 57.6,47.9 v1(56.3,49.2)
NetR6_2: R6.2 VD4.1 XP5.2 | length 13
  Top Layer w0.15: R6.2 54,45.3 55,46.3 VD4.1 57.3,46.3 58.64,44.96 XP5.2
NetR7_2: R7.2 VD6.2 XP5.3 | length 17.9
  Top Layer w0.15: R7.2 51,39.2 52.8,41 VD6.2 58.33,41 59.75,42.42 XP5.3
NetR8_2: R8.2 VD6.1 XP5.4 | length 29.4
  Top Layer w0.15: R8.2 44.2,48.3 45.7,46.8 v1(47,46.8) ; VD6.1 57.4,39.1 58.18,39.88 XP5.4
  Top Layer w0.6: v1(56.3,38.1) VD6.1
  Bottom Layer w0.15: v1(47,46.8) 45.7,45.5 45.7,38.6 47.1,37.2 55.4,37.2 v1(56.3,38.1)
NetR9_2: R9.2 VD5.2 XP6.1 | length 17.5
  Top Layer w0.15: R9.2 48,53.1 48.85,53.95 VD5.2 57.75,53.95 58.48,54.68 XP6.1
NetR10_2: R10.2 VD5.1 XP6.2 | length 35.9
  Top Layer w0.15: R10.2 43.4,42.305 44.895,43.8 v1(47,43.8) ; VD5.1 54.85,55.85 56.22,57.22 XP6.2
  Top Layer w0.6: VD5.1 v1(54,56.9)
  Bottom Layer w0.15: v1(47,43.8) 47,41.7 47.9,40.8 51.3,40.8 53,42.5 53,55.9 v1(54,56.9)
NetR11_2: R11.2 VD7.2 XP6.3 | length 28.6
  Top Layer w0.15: R11.2 v1(49.2,42.3) ; VD7.2 55.05,61.15 56.44,59.76 XP6.3
  Top Layer w0.6: v1(54,60.1) VD7.2
  Bottom Layer w0.15: v1(49.2,42.3) 51.3,44.4 51.3,57.4 v1(54,60.1)
NetVD1_2: VD1.2 XS1.1 | length 5.7
  Top Layer w0.45: XS1.1 17.4,79 VD1.2
pads on no net: DA1.4 DA2.2 DA2.3 DA2.4 DA2.5 DA2.6 DA2.15 DA2.16 DA2.17 DA3.6 DA3.7 DA3.8 DA3.9 DA3.14 DA3.15 DA4.4 DA5.4 DA5.5 DA6.4 DA6.5 VD7.1

## Polygon pours and split planes (outlines as drawn)
GND on Gnd top "GND_L02_P000" (solid, pour order 0): 0.5,85.5 0.5,0.5 72.5,0.5 72.5,85.5
GND on Gnd bot "GND_L03_P001" (solid, pour order 1): 0.5,85.5 72.5,85.5 72.5,0.5 0.5,0.5

## Silkscreen, mask and mechanical layers (free items; w line width, h text height)
Top Overlay:
  text "5V" at 4.4,84 h1
  text "OUTA" at 16.5,69.3 h1
  text "GND / LDAC / MODE / PRE" at 66.9,55 h1
  text "OUTB" at 16.5,49.8 h1
  text "SDI / SCLK / SDO / CS" at 66.9,40.2 h1
  text "R5-R11" at 44.9,38.4 h1
  text "AIN2" at 16.5,30.4 h1
  text "SDI / SCLK / SDO / CS" at 66.9,20.8 h1
Board:
  the board outline again, w0.1